# EAGLE board GeniusPanel (EAGLE 9.6.2)
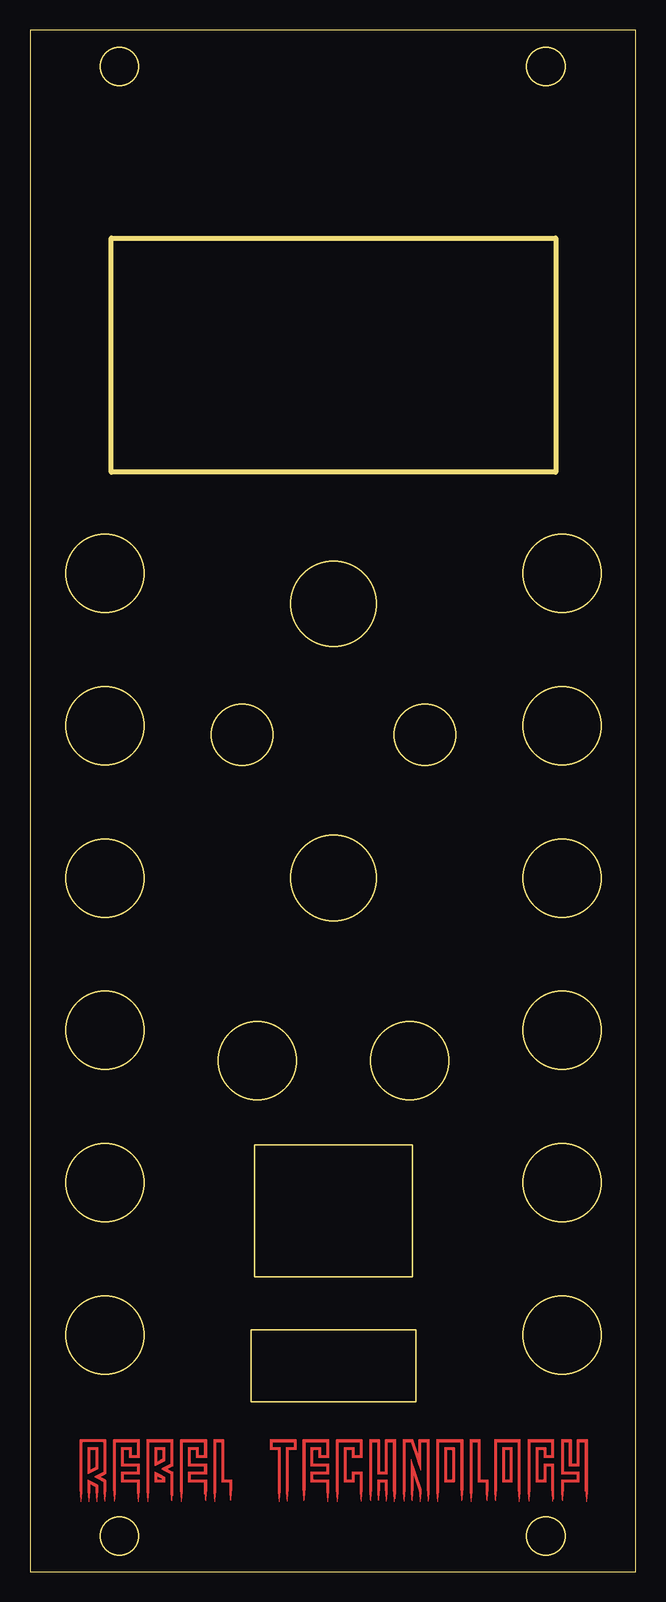
[diagram p0: board, top side]
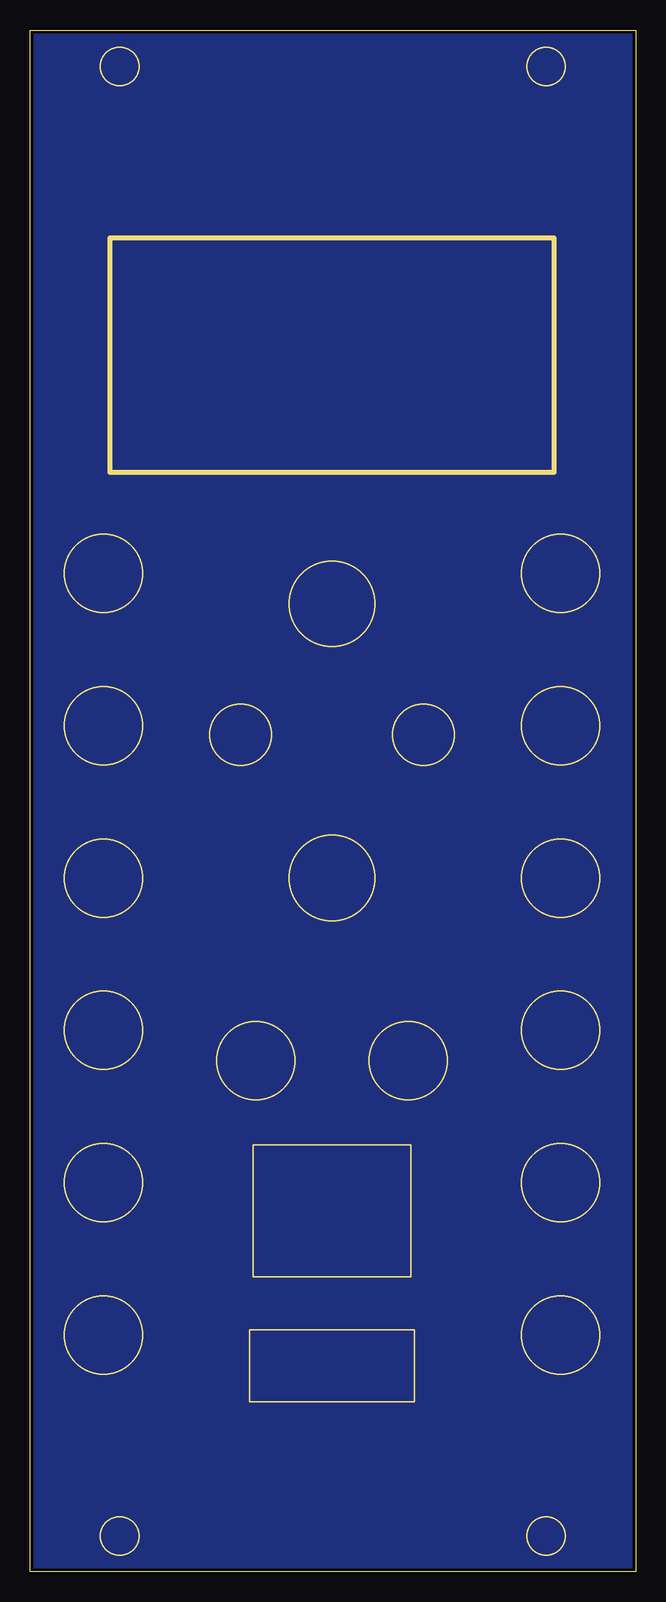
[diagram p1: board, bottom side, seen from below]

Size 50.5 x 128.5 mm. Coordinates in mm from the lower left corner, seen from the top.
Outline: 0,0 50.5,0 50.5,128.5 0,128.5 0,0
Copper layers (1*16): Top 0.035mm / dielectric 1.5mm / Bottom 0.035mm
Design rules "SeeedStudio_2layer_DRU_no_angle_20140221": minimum track width 6mil, minimum drill 12mil, track to track 6mil, track to pad 6mil, pad to pad 6mil, via to via 6mil, smd to smd 0mil, copper to edge 10mil, drill to drill 10mil, minimum pad ring 10mil, minimum via ring 6mil, stop-mask expansion 2mil, vias tented up to drill 100mil, thermal gap 10mil
Net classes: 1 power: width 0.178 mm, drill 0.305 mm, clearance 0.178 mm to class 0, clearance 0.178 mm
Milling: area 6.8,91.6 to 43.8,111.1

## Placement (x,y rotation side)
E$1  [HOLE_JACK]  6.26,83.21 0 top
E$2  [HOLE_JACK]  6.26,70.51 0 top
E$3  [HOLE_JACK]  6.26,57.81 0 top
E$4  [HOLE_JACK]  6.26,45.11 0 top
E$5  [HOLE_JACK]  18.96,42.57 0 top
E$6  [HOLE_JACK]  31.66,42.57 0 top
E$7  [HOLE_JACK]  6.26,32.41 0 top
E$8  [HOLE_JACK]  6.26,19.71 0 top
E$9  [HOLE_JACK]  44.36,45.11 0 top
E$10  [HOLE_JACK]  44.36,32.41 0 top
E$11  [HOLE_JACK]  44.36,19.71 0 top
E$12  [HOLE_JACK]  44.36,57.81 0 top
E$13  [HOLE_JACK]  44.36,70.51 0 top
E$14  [HOLE_JACK]  44.36,83.21 0 top
E$15  [HOLE_USB_A]  25.31,18.43 180 top
E$16  [HOLE_ENCODER]  25.31,80.67 0 top
E$17  [HOLE_ENCODER]  25.31,57.81 0 top
E$18  [HOLE_SWITCH_6MM]  17.69,69.75 0 top
E$19  [HOLE_SWITCH_6MM]  32.93,69.75 0 top
E$20  [HOLE_USB_B]  25.31,30.07 0 top
E$21  [HOLE_PANEL_CORNER]  7.46,2.96 0 top
E$22  [HOLE_PANEL_CORNER]  43.02,2.96 0 top
E$23  [HOLE_PANEL_CORNER]  7.46,125.46 0 top
E$24  [HOLE_PANEL_CORNER]  43.02,125.46 0 top

## Library data of the parts
E$1-E$24 = Rebel

## Tracks (layer width: path | path; a pad name or v marks a point on that pad's centre or on a via)
GND1
  pour Bottom: -0.04,128.51 50.51,128.51 50.51,-0.04 -0.04,-0.04
(copper drawn outside any net)
  shapes: Top area x4860